# Altium PCB Third_PCB.PcbDoc
Units mm, origin at the board's own origin, x right, y up, seen from the top; angles counter-clockwise.
Board outline 50 x 45 mm, 2 copper layers (Top Layer, Bottom Layer); 79 components, 56 nets, 264 pads, 250 vias.
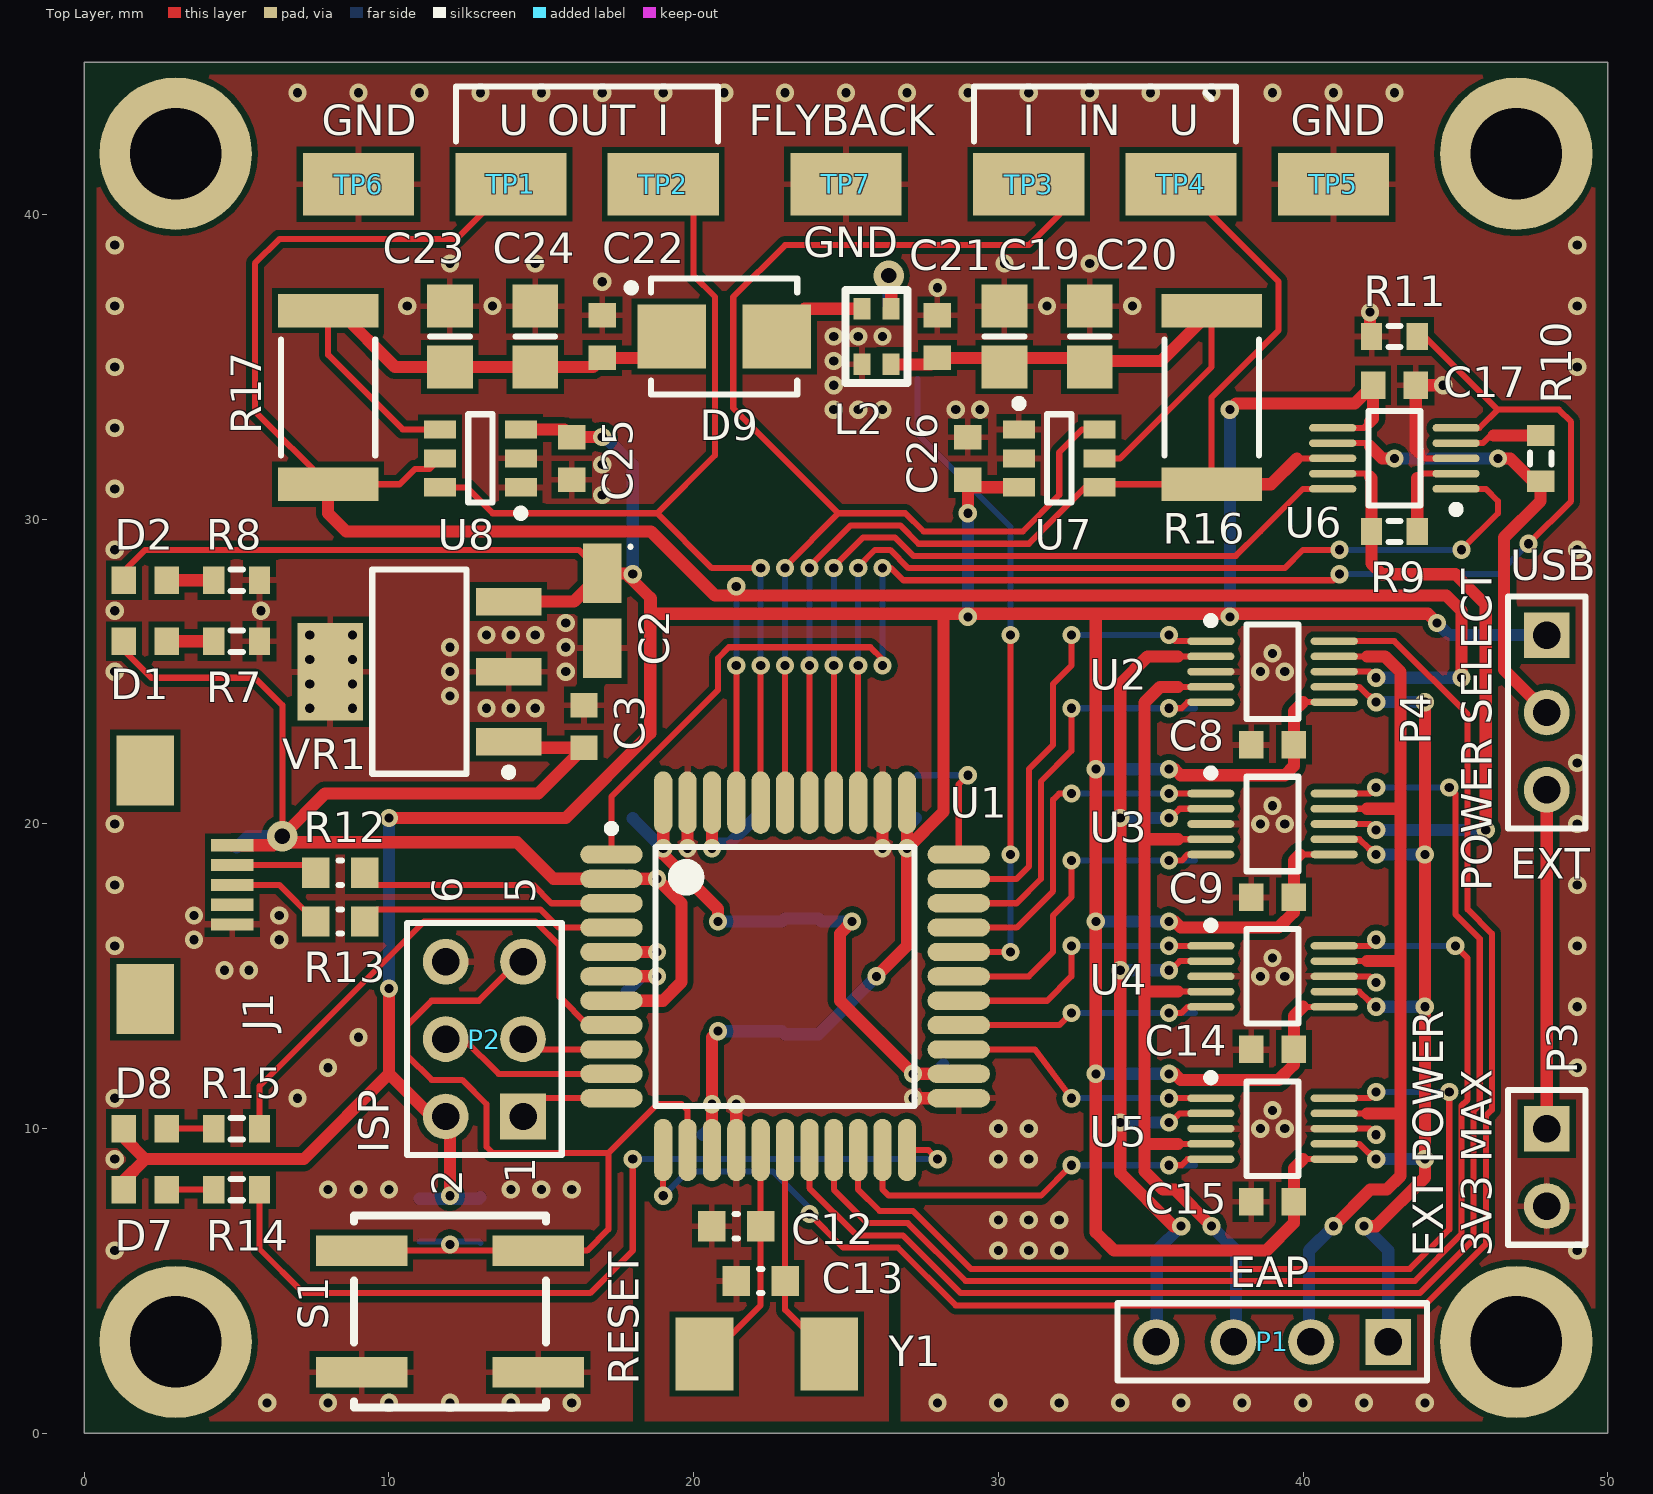
[diagram p0: Top Layer view]
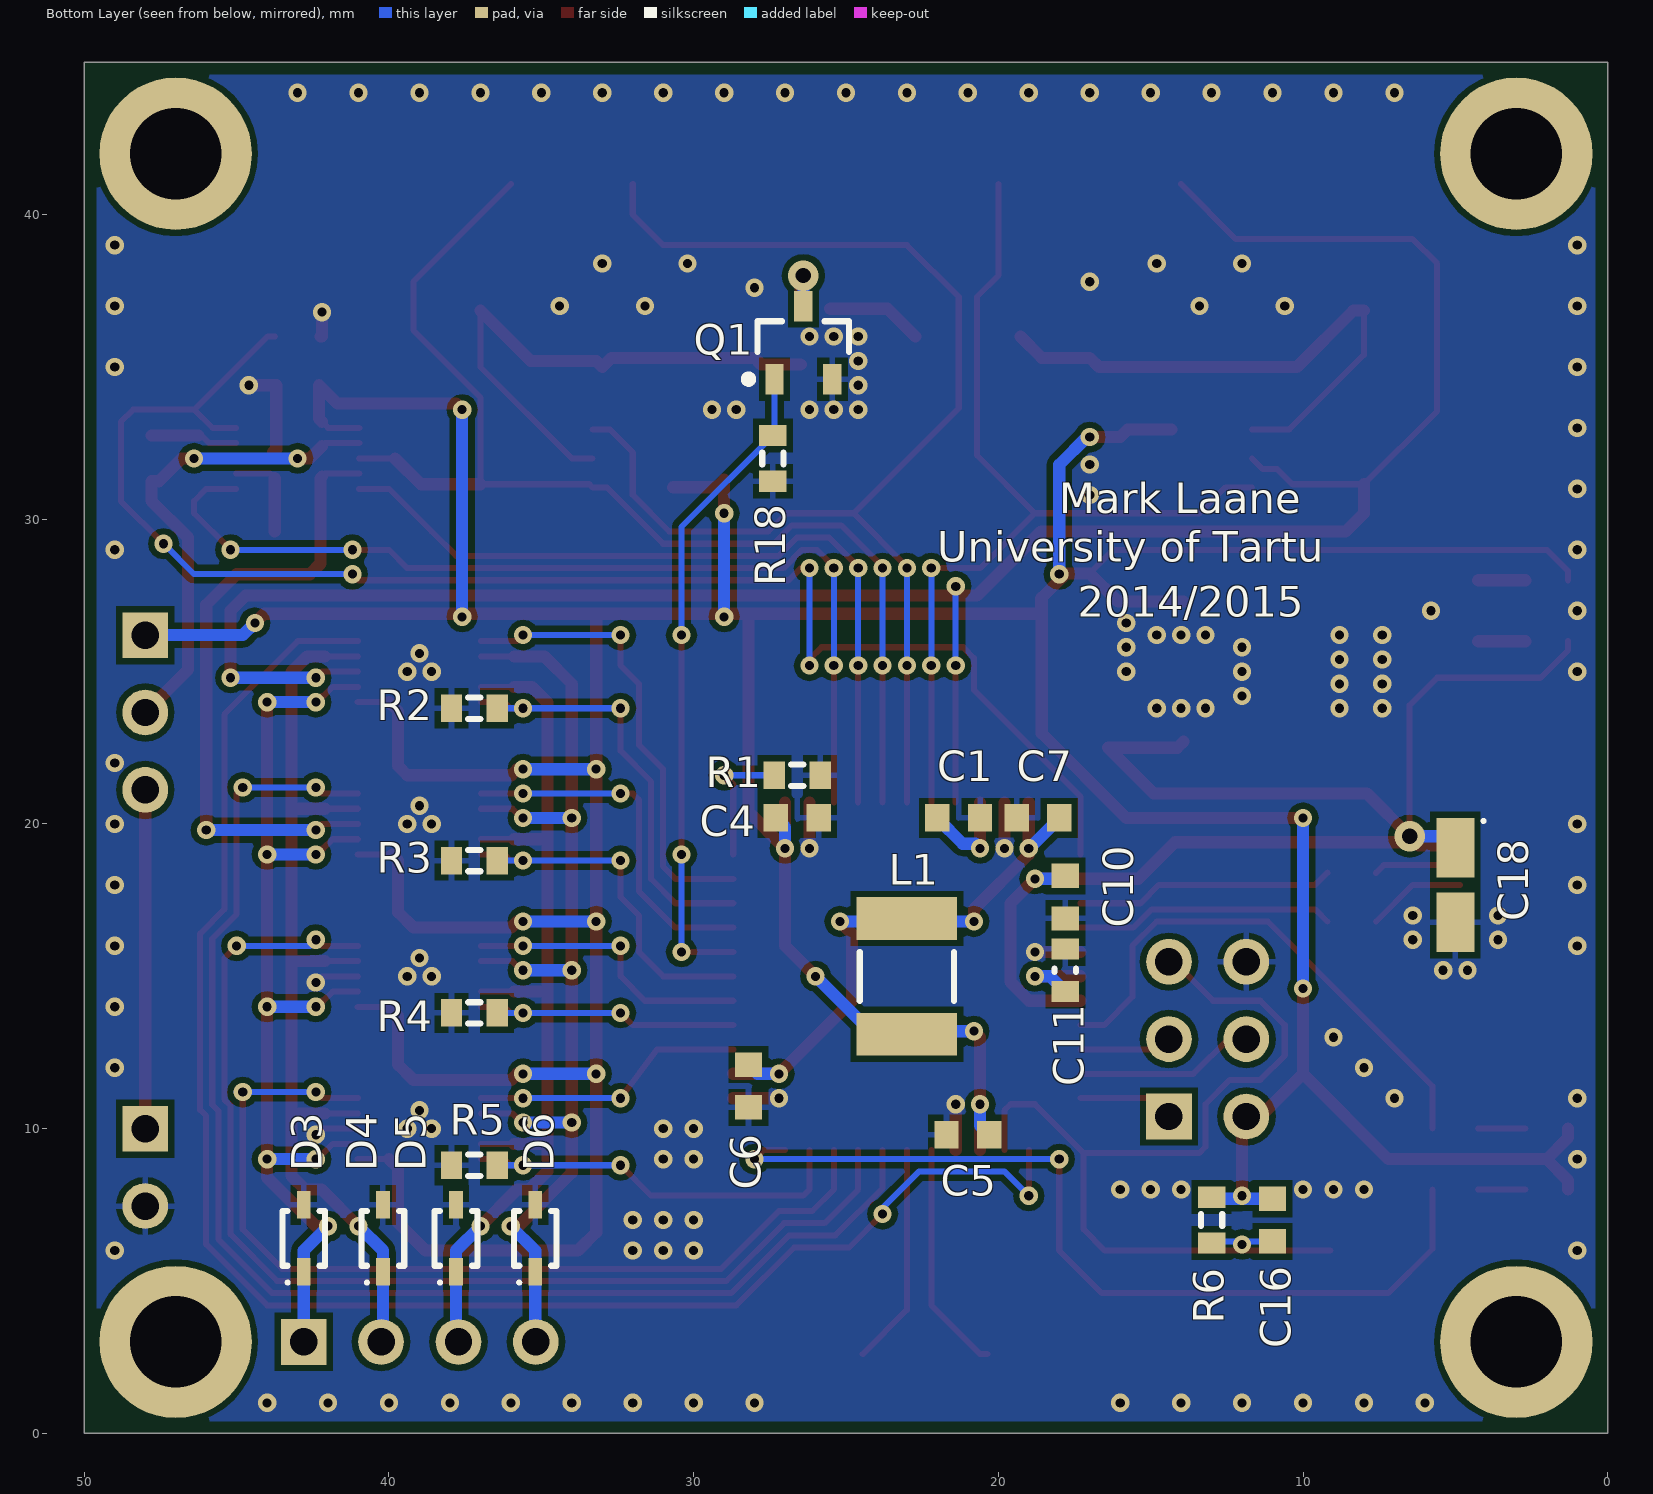
[diagram p1: Bottom Layer view, seen from below]

## Layer stack, top to bottom
Top Solder: solder mask 0.0102, Solder Resist, Dk 3.5
Top Layer: signal copper 0.0356
Dielectric 1: dielectric 0.32, FR-4, Dk 4.8
Bottom Layer: signal copper 0.0356
Bottom Solder: solder mask 0.0102, Solder Resist, Dk 3.5

## Board outline
0,0 50,0 50,45 0,45

## Design rules (kind name [scope] priority, off if disabled: settings)
Clearance [All] p1: gap=0.2
HoleSize [All] p1: absolutevalues=TRUE maxlimit=6.35 minlimit=0.3 maxpercent=80.000 minpercent=20.000
MinimumAnnularRing [All] p1: minimumring=0.15
MinimumSolderMaskSliver [All] p1: minsoldermaskwidth=0.1
PolygonConnect Vias [IsVia] p1: connectstyle=Direct reliefconductorwidth=1.254 reliefentries=4 polygonreliefangle="90 Angle" airgapwidth=0.254
PolygonConnect [All] p2: connectstyle=Relief reliefconductorwidth=0.2 reliefentries=4 polygonreliefangle="90 Angle" airgapwidth=0.2
RoutingVias [All] p1: holewidth=0.3 width=0.6 viastyle="Through Hole" minholewidth=0.3 minwidth=0.6 maxholewidth=6 maxwidth=10
SMDToPlane [All] p1: distance=1968504
SilkToSolderMaskClearance [IsPad] p1: minsilkscreentomaskgap=0.1 clearancetoexposedcopper=TRUE
SolderMaskExpansion "Covered Vias" [IsVia] p1: expansion=-999
SolderMaskExpansion [All] p2: expansion=0.102
UnpouredPolygon [All] p1: allowunpoured=FALSE
Width Power [InNet('3V3') OR InNet('GND') OR InNet('VBUS')] p1: maxlimit=0.4 minlimit=0.2 preferedwidth=0.4
Width [All] p2: maxlimit=0.4 minlimit=0.2 preferedwidth=0.2
26 further rules are at their usual default settings.

## Classes and differential pairs
component class Flyback: C19 C20 C21 C22 C23 C24 C25 C26 D9 L2 Q1 R16 R17 R18 U7 U8

## Components (designator, comment, footprint, x,y, rotation, side; value= is the part's Value field where it differs from the comment)
C1 "Cap Semi" 1608[0603] 21.3,20.2 r180 bottom
C2 "min 10uF" CAPMP3216X18N 17,27 r270 top
C3 "Cap Semi" 1608[0603] 16.4,23.2 r270 top
C4 "Cap Semi" 1608[0603] 26.6,20.2 r0 bottom
C5 "Cap Semi" 1608[0603] 21,9.8 r180 bottom
C6 "Cap Semi" 1608[0603] 28.2,11.4 r90 bottom
C7 "Cap Semi" 1608[0603] 18.7,20.2 r180 bottom
C8 "Cap Semi" 1608[0603] 39,22.6 r0 top
C9 "Cap Semi" 1608[0603] 39,17.6 r0 top
C10 "Cap Semi" 1608[0603] 17.8,17.6 r90 bottom
C11 "CAP 1uF 25V 0603(1608)" CAPC0603(1608)100_L 17.8,15.2 r270 bottom
C12 "CAP 27pF 50V 0603(1608)" CAPC0603(1608)100_N 21.4,6.8 r0 top
C13 "CAP 27pF 50V 0603(1608)" CAPC0603(1608)100_N 22.2,5 r0 top
C14 "Cap Semi" 1608[0603] 39,12.6 r0 top
C15 "Cap Semi" 1608[0603] 39,7.6 r0 top
C16 "Cap Semi" 1608[0603] 11,7 r90 bottom
C17 "Cap Semi" 1608[0603] 43,34.4 r180 top
C18 "10uF" CAPMP3216X18N 5,18 r270 bottom
C19 "Cap Semi" 6-0805_M 30.2,36 r270 top
C20 "Cap Semi" 6-0805_M 33,36 r270 top
C21 "Cap Semi" 1608[0603] 28,36 r270 top
C22 "Cap Semi" 1608[0603] 17,36 r270 top
C23 "Cap Semi" 6-0805_M 12,36 r270 top
C24 "Cap Semi" 6-0805_M 14.8,36 r270 top
C25 "Cap Semi" 1608[0603] 16,32 r90 top
C26 "Cap Semi" 1608[0603] 29,32 r270 top
D1 "Blue" 1608[0603] 2,26 r0 top
D2 "Green" 1608[0603] 2,28 r0 top
D3 "PMEG2005AEA" SOD323F 42.8,6.4 r90 bottom
D4 "PMEG2005AEA" SOD323F 40.2,6.4 r90 bottom
D5 "PMEG2005AEA" SOD323F 37.8,6.4 r90 bottom
D6 "PMEG2005AEA" SOD323F 35.2,6.4 r90 bottom
D7 "Green" 1608[0603] 2,8 r0 top
D8 "Yellow" 1608[0603] 2,10 r0 top
D9 "VS-10BQ030PbF" "VS-10BQ030PbF - DIOM4435X24N" 21,36 r0 top
J1 "USB micro B" "FCI MICRO USB B Receptable" 2,18 r270 top
L1 "Inductor" INDC4532 23,15 r90 bottom
L2 "COILCRAFT-PFD2015 (Rev)" PFD2015 26,36 r90 top
P1 "Header 4" HDR1X4 42.8,3 r180 top
P2 "ISCP" HDR2X3 14.4,10.4 r90 top
P3 "Header 2" HDR1X2 48,10 r270 top
P4 "Jumper" HDR1X3 48,26.2 r270 top
Q1 "IRFML8244TRPBF" SOT95P237X112-3N 26.4,35.8 r90 bottom
R1 "Res3" J1-0603 26.6,21.6 r0 bottom
R2 "Res3" J1-0603 37.2,23.8 r0 bottom
R3 "Res3" J1-0603 37.2,18.8 r0 bottom
R4 "Res3" J1-0603 37.2,13.8 r0 bottom
R5 "Res3" J1-0603 37.2,8.8 r0 bottom
R6 "Res3" J1-0603 13,7 r90 bottom
R7 "Res3" J1-0603 5,26 r180 top
R8 "Res3" J1-0603 5,28 r180 top
R9 "Res3" J1-0603 43,29.6 r0 top
R10 "Res3" J1-0603 47.8,32 r90 top
R11 "Res3" J1-0603 43,36 r180 top
R12 "22R 5% 0603(1608)" RESC0603(1608)_N 8.4,18.4 r0 top
R13 "22R 5% 0603(1608)" RESC0603(1608)_N 8.4,16.8 r0 top
R14 "Res3" J1-0603 5,8 r180 top
R15 "Res3" J1-0603 5,10 r180 top
R16 "Res3" RESC6332 37,34 r90 top
R17 "Res3" RESC6332 8,34 r270 top
R18 "Res3" J1-0603 27.4,32 r270 bottom
S1 "KSEM31J" KSEM31J 12,4 r180 top
TP1 "Testpoint" "Hawin testpoint" 14,41 r0 top
TP2 "Testpoint" "Hawin testpoint" 19,41 r0 top
TP3 "Testpoint" "Hawin testpoint" 31,41 r180 top
TP4 "Testpoint" "Hawin testpoint" 36,41 r180 top
TP5 "Testpoint" "Hawin testpoint" 41,41 r0 top
TP6 "Testpoint" "Hawin testpoint" 9,41 r180 top
TP7 "Testpoint" "Hawin testpoint" 25,41 r0 top
U1 "ATmega32U4-AU" 44ML_M 23,15 r0 top locked
U2 "ADG804YRMZ" ADI-RM-10_L 39,25 r0 top
U3 "ADG804YRMZ" ADI-RM-10_L 39,20 r0 top
U4 "ADG804YRMZ" ADI-RM-10_L 39,15 r0 top
U5 "ADG804YRMZ" ADI-RM-10_L 39,10 r0 top
U6 "ADG804YRMZ" ADI-RM-10_L 43,32 r180 top
U7 "ADM4073" "ADM4073 - SOT95P280X145-6N" 32,32 r0 top
U8 "ADM4073" "ADM4073 - SOT95P280X145-6N" 13,32 r180 top
VR1 "LM2937" "LM2937 - SOT230P700X180-4N" 11,25 r180 top
Y1 "8Mhz" ABM3 22.4,2.6 r0 top

## Footprints (in the part's own frame and the unit in brackets; to place one, negate y for a bottom-side part, rotate by r counter-clockwise, add the part's x,y. Pads: shape width x height; smd on the part's side, far side on the other; paste and mask are expansions set on the pad)
6-0805_M [mm] "Chip Resistor, Body 2.0x1.2mm, IPC Low Density"
  rect 1.4x1.5 smd: 1(-1,0) 2(1,0)
  silkscreen extent 0,-0.65 0,0.65, body extent -1.07,-0.7 1.07,0.7, height 0.7
44ML_M [mm] "Thin QFP, 44-Leads, Body 10x10mm, Pitch 0.8mm, IPC Low Density"
  oval 2.05x0.6 smd: 1(-5.7,4) 2(-5.7,3.2) 3(-5.7,2.4) 4(-5.7,1.6) 5(-5.7,0.8) 6(-5.7,0) 7(-5.7,-0.8) 8(-5.7,-1.6) 9(-5.7,-2.4) 10(-5.7,-3.2) 11(-5.7,-4) 23(5.7,-4) 24(5.7,-3.2) 25(5.7,-2.4) 26(5.7,-1.6) 27(5.7,-0.8) 28(5.7,0) 29(5.7,0.8) 30(5.7,1.6) 31(5.7,2.4) 32(5.7,3.2) 33(5.7,4)
  oval 0.6x2.05 smd: 12(-4,-5.7) 13(-3.2,-5.7) 14(-2.4,-5.7) 15(-1.6,-5.7) 16(-0.8,-5.7) 17(0,-5.7) 18(0.8,-5.7) 19(1.6,-5.7) 20(2.4,-5.7) 21(3.2,-5.7) 22(4,-5.7) 34(4,5.7) 35(3.2,5.7) 36(2.4,5.7) 37(1.6,5.7) 38(0.8,5.7) 39(0,5.7) 40(-0.8,5.7) 41(-1.6,5.7) 42(-2.4,5.7) 43(-3.2,5.7) 44(-4,5.7)
  silkscreen extent -5.82,-4.25 4.25,4.97, body extent -5,-5 5,5, height 1.2
1608[0603] [mm] "Chip Capacitor, Body 1.6x0.8mm, IPC High Density"
  rect 0.8x0.9 smd: 1(-0.7,0) 2(0.7,0)
  body extent -0.87,-0.48 0.87,0.48, height 1.3
ABM3 [mm]
  rect 1.9x2.4 smd: 1(-2.05,0) 2(2.05,0)
  body extent -2.5,-1.6 2.5,1.6, height 1.3
ADI-RM-10_L [mm] "SOP, 10-Leads, Body 3x3mm, Pitch 0.5mm, IPC High Density"
  oval 1.55x0.25 smd: 1(-2.025,1) 2(-2.025,0.5) 3(-2.025,0) 4(-2.025,-0.5) 5(-2.025,-1) 6(2.025,-1) 7(2.025,-0.5) 8(2.025,0) 9(2.025,0.5) 10(2.025,1)
  silkscreen extent -2.15,-1.55 0.85,1.8, body extent -1.55,-1.55 1.55,1.55, height 1.1
"ADM4073 - SOT95P280X145-6N" [mm] "SOT23, 6-Leads, Body 2.90x2.80mm, Pitch 0.95mm, IPC Medium Density"
  rect 1.05x0.6 smd: 1(-1.325,0.95) 2(-1.325,0) 3(-1.325,-0.95) 4(1.325,-0.95) 5(1.325,0) 6(1.325,0.95)
  silkscreen extent -1.45,-1.45 0.4,1.92, body extent -0.8,-1.45 0.8,1.45, height 1.45
CAPC0603(1608)100_L [mm] "Chip Capacitor, Body 1.6x0.8mm, Height 1.0mm, IPC High Density"
  rect 0.7x0.9 smd: 1(-0.7,0) 2(0.7,0)
  silkscreen extent -0.05,-0.35 0.05,0.35, body extent -0.87,-0.47 0.88,0.48, height 1
CAPC0603(1608)100_N [mm] "Chip Capacitor, Body 1.6x0.8mm, Height 1.0mm, IPC Medium Density"
  rect 0.9x1 smd: 1(-0.8,0) 2(0.8,0)
  silkscreen extent -0.05,-0.4 0.05,0.4, body extent -0.87,-0.48 0.88,0.47, height 1
CAPMP3216X18N [mm] "Molded Capacitor, 2-Leads, Body 3.20x1.60mm, IPC Medium Density"
  rect 1.95x1.25 smd: 1(1.225,0) 2(-1.225,0)
  silkscreen extent -2.15,0.88 -2.05,0.97, body extent -1.7,-0.9 1.7,0.9, height 1.8
"FCI MICRO USB B Receptable" [mm]
  rect 2.3x1.9 smd: Case(-3.75,0) Case(3.75,0)
  rect 0.4x1.4 smd: D+(0,2.85) D-(-0.65,2.85) GND(1.3,2.85) ID(0.65,2.85) Vbus(-1.3,2.85)
  body extent -4,-2.75 4,2.85, height 2.95
"Hawin testpoint" [mm]
  rect 3.65x2.05 smd: 0(0,0)
HDR1X2 [mm] "Connector; Header; 2 Position"
  rect 1.5x1.5 hole 0.9: 1(0,0)
  round 1.5 hole 0.9: 2(2.54,0)
  silkscreen extent -1.27,-1.27 3.81,1.27
HDR1X3 [mm] "Connector; Header; 3 Position"
  rect 1.5x1.5 hole 0.9: 1(0,0)
  round 1.5 hole 0.9: 2(2.54,0) 3(5.08,0)
  silkscreen extent -1.27,-1.27 6.35,1.27
HDR1X4 [mm] "Connector; Header; 4 Position"
  rect 1.5x1.5 hole 0.9: 1(0,0)
  round 1.5 hole 0.9: 2(2.54,0) 3(5.08,0) 4(7.62,0)
  silkscreen extent -1.27,-1.27 8.89,1.27
HDR2X3 [mm] "Connector; Header; 3x2 Position"
  rect 1.5x1.5 hole 0.9: 1(0,0)
  round 1.5 hole 0.9: 2(0,2.54) 3(2.54,0) 4(2.54,2.54) 5(5.08,0) 6(5.08,2.54)
  silkscreen extent -1.27,-1.27 6.35,3.81
INDC4532 [mm] "Chip Inductor, Body 4.5x3.2mm, IPC High Density"
  rect 1.4x3.3 smd: 1(-1.9,0) 2(1.9,0)
  silkscreen extent -0.8,-1.55 0.8,1.55, body extent -2.4,-1.7 2.4,1.7, height 0.55
J1-0603 [mm] "Chip Resistor, Body 1.6x0.8mm, IPC High Density"
  rect 0.7x0.9 smd: 1(-0.75,0) 2(0.75,0)
  silkscreen extent -0.2,-0.35 0.2,0.35, body extent -0.85,-0.48 0.85,0.48, height 0.9
KSEM31J [mm] "Tactile switch"
  rect 3x1 smd: 0(-2.9,-2) 0(2.9,-2) 1(-2.9,2) 1(2.9,2)
  silkscreen extent -3.15,-3.15 3.15,3.15
"LM2937 - SOT230P700X180-4N" [mm] "SOT223, 4-Leads, Body 6.50x7.00mm (avg), Pitch 2.30mm, IPC Medium Density"
  rect 2.15x0.9 smd: 1(-2.925,2.3) 2(-2.925,0) 3(-2.925,-2.3)
  rect 2.15x3.2 smd: 4(2.925,0)
  silkscreen extent -3.05,-3.35 1.55,3.42, body extent -1.85,-3.35 1.85,3.35, height 1.8
PFD2015 [mil] "Coupled inductor"
  rect 28x22 smd: 1(-36,-19) 2(36,-19) 3(36,19) 4(-36,19)
  silkscreen extent -60,-40 60,40
RESC0603(1608)_N [mm] "Chip Resistor, Body 1.6x0.8mm, IPC Medium Density"
  rect 0.9x1 smd: 1(-0.8,0) 2(0.8,0)
  silkscreen extent -0.05,-0.4 0.05,0.4, body extent -0.85,-0.47 0.85,0.47, height 0.6
RESC6332 [mm] "Chip Resistor, Body 6.3x3.2mm, IPC High Density"
  rect 1.1x3.3 smd: 1(-2.85,0) 2(2.85,0)
  silkscreen extent -1.9,-1.55 1.9,1.55, body extent -3.22,-1.68 3.22,1.68, height 0.9
SOD323F [mm] "SODFL, 2-Leads, Body 1.25x2.50mm, IPC Medium Density"
  rect 0.9x0.45 smd: 1(-1.1,0) 2(1.1,0)
  silkscreen extent -1.5,-0.7 0.9,0.7, body extent -0.9,-0.67 0.9,0.67, height 0.8
SOT95P237X112-3N [mm] "SOT23, 3-Leads, Body 2.92x2.37mm, Pitch 0.95mm, IPC Medium Density"
  rect 1x0.6 smd: 1(-1.2,0.95) 2(-1.2,-0.95) 3(1.2,0)
  silkscreen extent -1.32,-1.5 0.7,1.93, body extent -0.7,-1.52 0.7,1.52, height 1.12
"VS-10BQ030PbF - DIOM4435X24N" [mm] "Molded Diode, 2-Leads, Body 4.40x3.55mm, IPC Medium Density"
  rect 2.25x2.1 smd: 1(-1.725,0) 2(1.725,0)
  silkscreen extent -3.17,-1.9 2.4,1.9, body extent -2.35,-1.9 2.35,1.9, height 2.4

## Part data
C1 C3 C4 C5 C6 C7 C8 C9 C10 C14 C15 C16 C17 C19 C20 C21 C22 C23 C24 C25 C26: "Capacitor (Semiconductor SIM Model)"
C2 C18: library part Tantalum
C11: library part CMP-1035-00880-1
C12 C13: library part CMP-1035-00010-1
D1 D2 D7 D8: library part LED2, "Typical RED, GREEN, YELLOW, AMBER GaAs LED"
P1: "Header, 4-Pin"
P2: library part "Header 3X2", "Header, 3-Pin, Dual row"
P3: "Header, 2-Pin"
P4: library part "Header 3", "Header, 3-Pin"
Q1: "INTERNATIONAL RECTIFIER - IRFML8244TRPBF - N CH MOSFET, 25V, 5.8A, 3-SOT-23, FULL REEL"
R1 R2 R3 R4 R5 R6 R7 R8 R9 R10 R11 R14 R15 R16 R17 R18: "Resistor"
R12 R13: library part CMP-1012-00034-1, "22R 0.1W 5% 0603 (1608 Metric)  SMD"
U1: library part CMP-0095-00285-2, "8-bit AVR Microcontroller, 2.7-5.5V, 16MHz, 32KB Flash, 1KB EEPROM, 2.5KB SRAM, USB Controller, 44-pin TQFP, Industrial Grade (-40°C to 85°C), Ext Osc"
U2 U3 U4 U5 U6: library part CMP-0798-00106-1, "1.65 to 3.6 V, CMOS, 0.5 Ohm, 4-Channel Multiplexer, -40 to 125 degC, 10-pin SOP (RM-10), Tube"
Y1: library part "Abracon ABM3 Crystal"

## Free pads (board coordinates)
  round 5 hole 3 mask+0: MOUNT(3,3) MOUNT(3,42) MOUNT(47,3) MOUNT(47,42)

## Via types
v1: diameter 0.6, hole 0.3, Top Layer to Bottom Layer, 248 vias
v2: diameter 1, hole 0.5, Top Layer to Bottom Layer, 2 vias

## Nets (pads, with @x,y where several pads share a name; then routed paths per layer and width w, separated by ;. In a path a pad name is that pad's centre, name@x,y a point inside that pad or via, vN(x,y) a via of type N, cw(c..) or ccw(c..) an arc to the next point about the centre after c; other vN are vias at no path point)
3V3: C2.2 C4.2 C5.2 C8.2 C9.2 C14.2 C15.2 C16.2 C17.2 C25.2 C26.2 D2.1 D7.1 D8.1 L1.1 P2.2 P4.1 R6.2 U1.14 U1.34 U2.6 U3.6 U4.6 U5.6 U6.6 U7.3 U8.3 VR1.3 | length 209
  Top Layer w0.2: D2.1 1.3,28.3 2,29 16.225,29 C2.2 ; 39.894,19 U3.6 ; 40,9 U5.6 ; 40,14 40.2,14 U4.6 ; 40,24 U2.6 ; U6.6 42,33 42.2,33.2
  Top Layer w0.4: D7.1 1.3,8.3 2,9 ; D8.1 1.3,9.7 2,9 ; v1(10,14.6) 10,11.8 ; v1(10,20.2) 15.8,20.2 18.575,22.975 18.575,27.425 ; v1(12,7.8) 12,10.26 P2.2 11.4,10.4 10,11.8 ; VR1.3 16.075,27.3 C2.2 v1@17.775,28.225 ; U8.3 15.75,32.95 C25.2 v1(17,32.7) ; v1@17.9,28.1 18.575,27.425 ; U1.14 v1(20.6,10.8) 20.6,13 v1(20.8,13.2) ; v1(26,15) 27,16 v1(27,19.2) ; U1.34 v1(27,19.2) ; v1(29,26.8) v1@29,26.9 ; v1(29,30.2) C26.2 29.25,31.05 U7.3 ; v1(35.6,11.8) 35.79,11.8 35.99,11.6 39.2,11.6 39.7,12.1 C14.2 39.7,13.7 40,14 ; v1(35.6,16.8) 35.79,16.8 35.99,16.6 39.2,16.6 39.7,17.1 C9.2 39.7,18.806 39.894,19 ; v1(35.6,21.8) 35.79,21.8 35.99,21.6 39.4,21.6 39.7,21.9 C8.2 39.7,23.7 40,24 ; v1(37.6,33.6) 37.8,33.8 41.7,33.8 C17.2 42.3,33.3 42.2,33.2 ; 40,9 39.7,8.7 C15.2 39.7,6.9 38.8,6 33.8,6 33.2,6.6 v1(33.2,11.8) v1(33.2,16.8) v1(33.2,21.8) 33.2,26.9 ; v1(44.4,26.6) 44.1,26.9 33.2,26.9 ; 2,9 7.2,9 10,11.8 ; 18.575,27.425 18.6,27.4 18.6,26.8 18.7,26.9 28.2,26.9 ; v1(27,19.2) 28.2,20.4 28.2,26.9 ; 28.2,26.9 v1@29,26.9 ; v1@29,26.9 33.2,26.9
  Bottom Layer w0.4: v1(10,14.6) v1(10,20.2) ; C16.2 12.95,7.7 R6.2 ; v1(17,32.7) 17.09,32.7 18,31.79 v1(18,28.2) ; C5.2 20.6,10.1 v1(20.6,10.8) ; v1(20.8,13.2) 22.9,13.2 L1.1 24.1,13.1 v1(26,15) ; v1(27,19.2) 27,19.9 C4.2 ; v1(29,26.8) v1(29,30.2) ; v1(33.2,11.8) v1(35.6,11.8) ; v1(33.2,16.8) v1(35.6,16.8) ; v1(33.2,21.8) v1(35.6,21.8) ; v1(37.6,26.8) v1(37.6,33.6) ; v1(44.4,26.6) 44.8,26.2 P4.1
A0_0: U1.30 U3.1 | length 11.9
  Top Layer w0.2: U1.30 30.6,16.6 31.8,17.8 31.8,20.8 32,21 v1(32.4,21) ; v1(35.6,21) U3.1
  Bottom Layer w0.2: v1(32.4,21) v1(35.6,21)
A0_1: U1.32 U2.1 | length 15.3
  Top Layer w0.2: U1.32 30,18.2 30.6,18.2 31,18.6 31,21.8 31.8,22.6 31.8,24.6 32.4,25.2 v1(32.4,26.2) ; v1(35.6,26.2) 35.8,26 U2.1
  Bottom Layer w0.2: v1(32.4,26.2) v1(35.6,26.2)
A0_2: U1.27 U4.1 | length 9.6
  Top Layer w0.2: U1.27 31.6,14.2 32.4,15 v1(32.4,16) ; v1(35.6,16) U4.1
  Bottom Layer w0.2: v1(32.4,16) v1(35.6,16)
A0_3: U1.25 U5.1 | length 9.1
  Top Layer w0.2: U1.25 31.2,12.6 v1(32.4,11) ; v1(35.6,11) U5.1
  Bottom Layer w0.2: v1(32.4,11) v1(35.6,11)
A0_4: U1.36 U6.1 | length 31.9
  Top Layer w0.2: U1.36 v1(25.4,25.2) ; v1(25.4,28.4) 25.4,28.449 25.951,29 26.449,29 27.049,28.4 39.4,28.4 40,29 v1(41.2,29) ; U6.1 46,31 46.4,30.6 46.4,30.2 v1(45.2,29)
  Bottom Layer w0.2: v1(25.4,25.2) v1(25.4,28.4) ; v1(41.2,29) v1(45.2,29)
A1_0: U1.18 U3.10 | length 44.4
  Top Layer w0.2: U1.18 23.8,8.049 25.349,6.5 26.866,6.5 28.766,4.6 43.834,4.6 45.6,6.366 45.6,10.586 45.8,10.786 45.8,16.234 45,17.034 45,21 v1(44.8,21.2) ; U3.10 42.2,21 v1(42.4,21.2)
  Bottom Layer w0.2: v1(42.4,21.2) v1(44.8,21.2)
A1_1: U1.12 U2.10 | length 54.8
  Top Layer w0.2: v1(19,7.8) U1.12 ; v1(23.8,7.2) 24.9,6.1 26.7,6.1 28.6,4.2 44,4.2 46,6.2 46,10.42 46.2,10.62 46.2,16.4 45.4,17.2 45.4,23.6 43,26 U2.10
  Bottom Layer w0.2: v1(19,7.8) 19.8,8.6 22.6,8.6 23.8,7.4 v1(23.8,7.2)
A1_2: U1.19 U4.10 | length 37.6
  Top Layer w0.2: U1.19 24.6,8 25.7,6.9 27.031,6.9 28.931,5 43.669,5 45.2,6.531 45.2,10.751 45.4,10.951 45.4,15.6 v1(45,16) ; U4.10 42.2,16 v1(42.4,16.2)
  Bottom Layer w0.2: v1(42.4,16.2) 42.6,16 v1(45,16)
A1_3: U1.20 U5.10 | length 31.1
  Top Layer w0.2: U1.20 25.4,8 26.1,7.3 27.197,7.3 29.097,5.4 43.503,5.4 44.8,6.697 v1(44.8,11.2) ; U5.10 42.2,11 v1(42.4,11.2)
  Bottom Layer w0.2: v1(42.4,11.2) 45,11.2 v1(44.8,11.2)
A1_4: U1.37 U6.10 | length 25.7
  Top Layer w0.2: U1.37 v1(24.6,25.2) ; v1(24.6,28.4) 24.6,28.449 25.551,29.4 26.614,29.4 27.214,28.8 37.8,28.8 38.6,29.6 40,31 U6.10
  Bottom Layer w0.2: v1(24.6,25.2) v1(24.6,28.4)
EAP_IN: R17.2 TP1.0 U1.41 U2.8 U8.5 | length 74.8
  Top Layer w0.2: U8.5 11.325,31.65 10.85,31.65 10.35,31.15 R17.2 5.6,33.55 5.6,38.4 6.4,39.2 12.2,39.2 TP1.0 ; U1.41 v1(21.4,25.2) ; U2.8 42.2,25 v1(42.4,24.8)
  Top Layer w0.4: R17.2 8,30.2 8.6,29.6 18.6,29.6 20.7,27.5 44.7,27.5 45.2,27 v1(45.2,24.8)
  Bottom Layer w0.2: v1(21.4,25.2) 21.4,27 v1(21.4,27.8)
  Bottom Layer w0.4: v1(42.4,24.8) v1(45.2,24.8)
EAP_IN_CURRENT: TP2.0 U1.40 U8.6 | length 31.2
  Top Layer w0.2: U8.6 12.55,31.05 13.4,30.2 18.8,30.2 ; TP2.0@20,41 20,38 20.7,37.3 20.7,32.1 18.8,30.2 ; U1.40 v1(22.2,25.2) ; v1(22.2,28.4) 20.6,28.4 18.8,30.2
  Bottom Layer w0.2: v1(22.2,25.2) v1(22.2,28.4)
EAP_OUT: R9.1 U3.8 U6.9 | length 20.9
  Top Layer w0.2: U6.9 42.1,31.5 42.2,31.4 ; U3.8 42.2,20 v1(42.4,19.8)
  Top Layer w0.4: 42.2,31.4 42.25,31.35 R9.1 42.25,28.55 42.6,28.2 45,28.2 46,27.2 v1(46,19.8)
  Bottom Layer w0.4: v1(42.4,19.8) v1(46,19.8)
EN_0: R3.1 U1.28 U3.5 | length 12.2
  Top Layer w0.2: U1.28 31,15 31.8,15.8 31.8,17 32.4,17.6 v1(32.4,18.8) ; v1(35.6,18.8) 35.8,18.8 36.014,18.8 36.214,19 U3.5
  Bottom Layer w0.2: v1(32.4,18.8) v1(35.6,18.8) R3.1
EN_1: R2.1 U1.31 U2.5 | length 14.6
  Top Layer w0.2: U1.31 30.6,17.4 31.4,18.2 31.4,21.4 32.4,22.4 v1(32.4,23.8) ; v1(35.6,23.8) 35.8,23.8 36.014,23.8 36.214,24 U2.5
  Bottom Layer w0.2: v1(32.4,23.8) v1(35.6,23.8) R2.1
EN_2: R4.1 U1.26 U4.5 | length 9.4
  Top Layer w0.2: U1.26 32,13.4 v1(32.4,13.8) ; v1(35.6,13.8) 35.8,13.8 36.014,13.8 36.214,14 U4.5
  Bottom Layer w0.2: v1(32.4,13.8) v1(35.6,13.8) R4.1
EN_3: R5.1 U1.21 U5.5 | length 13.5
  Top Layer w0.2: U1.21 26.2,8 26.4,7.8 31.4,7.8 v1(32.4,8.8) ; v1(35.6,8.8) 36.014,8.8 36.214,9 U5.5
  Bottom Layer w0.2: v1(32.4,8.8) v1(35.6,8.8) R5.1
EN_4: R11.1 U1.1 U6.5 | length 51.3
  Top Layer w0.2: U1.1 17.3,20.9 20.8,24.4 20.8,25.449 21.151,25.8 25.8,25.8 26.2,25.4 v1(26.2,25.2) ; v1(26.2,28.4) 26.483,28.4 26.883,28 41,28 v1(41.2,28.2) ; R11.1 43.993,36 46.393,33.6 ; U6.5 45.793,33 46.393,33.6 ; v1(47.4,29.2) 48.8,30.6 48.8,33.2 48.4,33.6 46.393,33.6
  Bottom Layer w0.2: v1(26.2,25.2) v1(26.2,28.4) ; v1(41.2,28.2) 46.4,28.2 v1(47.4,29.2)
EXT_VCC: P3.1 P4.3 | length 11.1
  Top Layer w0.4: P3.1 P4.3
FLYBACK_CONTROL: Q1.1 R18.1 U1.29 | length 22.1
  Top Layer w0.2: U1.29 30.6,15.8 v1(30.4,15.8) ; v1(30.4,19) v1(30.4,26.2)
  Bottom Layer w0.2: R18.1@27.35,32.8 Q1.1 ; R18.1 30.4,29.75 v1(30.4,26.2) ; v1(30.4,15.8) v1(30.4,19)
FLYBACK_IN: R16.1 TP4.0 U1.38 U6.8 U7.4 | length 39
  Top Layer w0.2: U1.38 v1(23.8,25.2) ; v1(23.8,28.4) 23.8,28.449 25.151,29.8 26.78,29.8 27.38,29.2 31,29.2 32.85,31.05 U7.4 33.425,31.15 R16.1 37,34 39.2,36.2 39.2,37.8 TP4.0 ; 39.8,32 U6.8
  Top Layer w0.4: R16.1 38.95,31.15 39.8,32
  Bottom Layer w0.2: v1(23.8,25.2) v1(23.8,28.4)
FLYBACK_IN_CURRENT: TP3.0 U1.39 U7.6 | length 42.6
  Top Layer w0.2: U1.39 v1(23,25.2) ; v1(23,28.4) 23,28.449 24.751,30.2 ; TP3.0@32,41 32,40 31,39 23,39 21.3,37.3 21.3,33.651 24.751,30.2 ; U7.6 32.75,32.95 32,32.2 32,30.8 30.8,29.6 27.546,29.6 26.946,30.2 24.751,30.2
  Bottom Layer w0.2: v1(23,25.2) v1(23,28.4)
GND: C1.2 C2.1 C3.1 C4.1 C5.1 C6.1 C7.1 C8.1 C9.1 C10.1 C11.1 C12.1 C13.1 C14.1 C15.1 C17.1 C18.1 C19.1 C20.1 C21.1 C22.1 C23.1 C24.1 C25.1 C26.1 D3.2 D4.2 D5.2 D6.2 J1.GND L2.4 P2.6 P3.2 Q1.2 R1.1 R2.2 R3.2 R4.2 R5.2 R7.1 R8.1 R11.2 R18.2 S1.1 TP5.0 TP6.0 TP7.0 U1.5 U1.15 U1.23 U1.35 U1.43 U2.3 U3.3 U4.3 U4.8 U5.3 U5.8 U6.3 U7.1 U7.2 U8.1 U8.2 VR1.2 VR1.4 | length 15.7
  Top Layer w0.2: U5.8 42.2,10 v1(42.4,9.8) ; U4.8 42.2,15 v1(42.4,14.8) ; 43.8,32.2 44,32 U6.3
  Top Layer w0.4: U1.5 v1(18.8,15.8) ; v1(19.8,19.2) U1.43 ; U1.15 v1(21.4,10.8) ; v1(26.2,19.2) U1.35 ; v1(27.2,11) U1.23 ; v1(42.2,36.8) 42.2,36 R11.2 ; 43.8,32.2 43.7,32.3 C17.1 v1(44.6,34.4)
  other v1: 6,1 8,1 10,1 12,1 14,1 16,1 28,1 30,1 32,1 34,1 36,1 38,1 40,1 42,1 44,1 1,6 30,6 31,6 32,6 49,6 30,7 31,7 32,7 8,8 9,8 10,8 14,8 15,8 16,8 1,9 30,9 31,9 30,10 31,10 38.6,10 39.4,10 39,10.6 1,11 7,11 8,12 49,12 9,13 49,14 38.6,15 39.4,15 4.6,15.2 5.4,15.2 39,15.6 1,16 49,16 3.6,16.2 6.4,16.2 3.6,17 6.4,17 1,18 49,18 1,20 38.6,20 39.4,20 49,20 39,20.6 49,22 7.4,23.8 8.8,23.8 13.2,23.8 14,23.8 14.8,23.8 12,24.2 7.4,24.6 8.8,24.6 1,25 12,25 15.8,25 38.6,25 39.4,25 7.4,25.4 8.8,25.4 39,25.6 12,25.8 15.8,25.8 7.4,26.2 8.8,26.2 13.2,26.2 14,26.2 14.8,26.2 15.8,26.6 1,27 5.8,27 1,29 49,29 17,30.8 1,31 17,31.8 1,33 24.6,33.6 25.4,33.6 26.2,33.6 28.6,33.6 29.4,33.6 24.6,34.4 1,35 49,35 24.6,35.2 24.6,36 25.4,36 26.2,36 1,37 10.6,37 13.4,37 31.6,37 34.4,37 49,37 28,37.6 17,37.8 12,38.4 14.8,38.4 30.2,38.4 33,38.4 1,39 49,39 7,44 9,44 11,44 13,44 15,44 17,44 19,44 21,44 23,44 25,44 27,44 29,44 31,44 33,44 35,44 37,44 39,44 41,44 43,44
MISO: P2.1 U1.11 | length 3.1
  Top Layer w0.2: P2.1 15,11 U1.11
MOSI: P2.4 U1.10 | length 5.9
  Top Layer w0.2: P2.4 12.46,12.94 13.6,11.8 U1.10
NetC1_1: C1.1 U1.42 | length 3.3
  Top Layer w0.4: v1(20.6,19.2) U1.42
  Bottom Layer w0.4: v1(20.6,19.2) 20.75,19.35 21.166,19.35 22,20.184 C1.1
NetC6_2: C6.2 C7.2 L1.2 U1.24 U1.44 | length 19.3
  Top Layer w0.4: U1.44 v1(19,19.2) 19,19.01 20.8,17.21 v1(20.8,16.8) ; v1(25.2,16.8) 24.8,16.4 24.8,14.2 v1(27.2,11.8) U1.24
  Bottom Layer w0.4: C7.2 18,20.184 18.984,19.2 v1(19,19.2) ; v1(20.8,16.8) 22.9,16.8 L1.2 24.1,16.9 24.2,16.8 v1(25.2,16.8) ; v1(27.2,11.8) 27.9,11.8 C6.2
NetC11_2: C11.2 U1.6 | length 2.7
  Top Layer w0.4: U1.6 v1(18.8,15)
  Bottom Layer w0.4: C11.2 18.3,15 v1(18.8,15)
NetC12_2: C12.2 U1.16 Y1.1 | length 7.6
  Top Layer w0.2: Y1.1 20.6,2.6 22.2,4.2 C12.2 U1.16
NetC13_2: C13.2 U1.17 Y1.2 | length 7.3
  Top Layer w0.2: U1.17 23,4.05 Y1.2
NetC19_2: C19.2 C20.2 C21.2 L2.1 R16.2 U7.5 | length 18.3
  Top Layer w0.2: U7.5 34,32 37,35 R16.2
  Top Layer w0.4: L2.1 27.786,35.086 C21.2 32.7,35.3 C20.2 33.2,35.2 35.35,35.2 R16.2
NetC22_2: C22.2 C23.2 C24.2 D9.1 R17.1 U8.4 | length 18.6
  Top Layer w0.2: R17.1 8,35.4 10.45,32.95 U8.4
  Top Layer w0.4: R17.1 8.35,36.85 10.2,35 C23.2 16.7,35 C22.2 18.575,35.3 D9.1
NetD1_2: D1.2 R7.2 | length 1.5
  Top Layer w0.4: D1.2 R7.2
NetD2_2: D2.2 R8.2 | length 1.5
  Top Layer w0.4: D2.2 R8.2
NetD3_1: D3.1 P1.1 U2.7 U3.7 U4.7 U5.7 | length 35.1
  Top Layer w0.2: U5.7 41.851,9.5 42.151,9.2 42.2,9.2 v1(42.4,9) ; U4.7 41.851,14.5 42.151,14.2 42.2,14.2 v1(42.4,14) ; U3.7 41.851,19.5 42.151,19.2 42.2,19.2 v1(42.4,19) ; U2.7 41.851,24.5 42.151,24.2 42.2,24.2 v1(42.4,24)
  Top Layer w0.4: v1(42,6.8) 42.4,6.8 44,8.4 v1(44,9) v1(44,14) v1(44,19) v1(44,24)
  Bottom Layer w0.4: v1(42,6.8) 42.8,6 P1.1 ; v1(42.4,9) v1(44,9) ; v1(42.4,14) v1(44,14) ; v1(42.4,19) v1(44,19) ; v1(42.4,24) v1(44,24)
NetD4_1: D4.1 P1.2 U2.9 U3.9 U4.9 U5.9 | length 32.3
  Top Layer w0.2: U5.9 42.1,10.5 ; U4.9 42.1,15.5 ; U3.9 42.1,20.5 ; U2.9 42.1,25.5
  Top Layer w0.4: v1(41,6.8) 41.01,6.8 42.21,8 42.751,8 43.2,8.449 43.2,15.4 ; 42.1,10.5 43.1,10.5 ; 42.1,15.5 43.1,15.5 43.2,15.4 ; 42.1,20.5 43.1,20.5 ; 42.1,25.5 42.69,25.5 43.2,24.99 43.2,15.4
  Bottom Layer w0.4: P1.2 40.2,3.06 D4.1 40.2,6 v1(41,6.8)
NetD5_1: D5.1 P1.3 U2.4 U3.4 U4.4 U5.4 | length 31.4
  Top Layer w0.2: 35.9,9.5 U5.4 ; 35.9,14.5 U4.4 ; 35.9,19.5 U3.4 ; 35.9,24.5 U2.4
  Top Layer w0.4: 34.9,14.5 35.9,14.5 ; 35.9,9.5 34.9,9.5 34.8,9.6 ; 35.9,19.5 34.9,19.5 34.8,19.6 ; 35.9,24.5 35.31,24.5 34.8,23.99 34.8,19.6 ; v1(37,6.8) 35.8,8 35.4,8 34.8,8.6 34.8,9.6 ; 34.8,9.6 34.8,19.6
  Bottom Layer w0.4: v1(37,6.8) 37.8,6 37.8,3.08 P1.3
NetD6_1: D6.1 P1.4 U2.2 U3.2 U4.2 U5.2 | length 35.6
  Top Layer w0.2: v1(35.6,10.2) 35.649,10.2 35.949,10.5 U5.2 ; v1(35.6,15.2) 35.649,15.2 35.949,15.5 U4.2 ; v1(35.6,20.2) 35.649,20.2 35.949,20.5 U3.2 ; 35.9,25.5 U2.2
  Top Layer w0.4: 35.9,25.5 34.9,25.5 34,24.6 v1(34,20.2) v1(34,15.2) v1(34,10.2) 34,8.551 35.751,6.8 v1(36,6.8)
  Bottom Layer w0.4: v1(34,10.2) v1(35.6,10.2) ; v1(34,15.2) v1(35.6,15.2) ; v1(34,20.2) v1(35.6,20.2) ; P1.4 35.2,3.02 D6.1 35.2,6 v1(36,6.8)
NetD7_2: D7.2 R14.2 | length 1.5
  Top Layer w0.2: D7.2 R14.2
NetD8_2: D8.2 R15.2 | length 1.5
  Top Layer w0.2: D8.2 R15.2
NetD9_2: D9.2 L2.3 | length 3.2
  Top Layer w0.4: D9.2 23.639,36.914 L2.3
NetJ1_D+: J1.D+ R13.1 | length 3.2
  Top Layer w0.2: J1.D+ 6.4,18 R13.1
NetJ1_D-: J1.D- R12.1 | length 2.9
  Top Layer w0.2: J1.D- 7.35,18.65 R12.1
NetL2_2: L2.2 Q1.3 | length 2.1
  Top Layer w0.4: v2(26.4,38) 26.483,37.917 L2.2
  Bottom Layer w0.4: Q1.3 v2(26.4,38)
NetP4_2: P4.2 R10.1 U6.7 | length 16
  Top Layer w0.2: U6.7 42.1,32.5 42.2,32.4
  Top Layer w0.4: 42.2,32.4 42.6,32 v1(43,32) ; v1(46.4,32) 46.8,32 47.55,31.25 R10.1 47.8,30.6 46.6,29.4 46.6,25.06 P4.2
  Bottom Layer w0.4: v1(43,32) v1(46.4,32)
NetR1_2: R1.2 U1.33 | length 4.4
  Top Layer w0.2: U1.33 28.7,21.3 v1(29,21.6)
  Bottom Layer w0.2: R1.2 v1(29,21.6)
NetR9_2: R9.2 U6.2 | length 3.1
  Top Layer w0.2: 43.75,31.35 43.9,31.5 U6.2
  Top Layer w0.4: R9.2 43.75,31.35
NetR10_2: R10.2 U6.4 | length 2.9
  Top Layer w0.2: U6.4 45.9,32.5 46.15,32.75 46.25,32.75
  Top Layer w0.4: 46.25,32.75 R10.2
RST: C16.1 P2.5 R6.1 S1.0 U1.13 | length 32
  Top Layer w0.2: S1.0@9.1,6 14.9,6 16.5,6 17.2,6.7 17.2,9.2 ; P2.5 14.231,15.48 12.951,14.2 11.4,14.2 10.6,13.4 10.6,12.4 11.4,11.6 12.4,11.6 13.2,10.8 13.2,9.4 13.4,9.2 17.2,9.2 ; U1.13 19.8,10.6 19.6,10.8 18.8,10.8 17.2,9.2
  Bottom Layer w0.2: C16.1 12.95,6.3 R6.1
  other v1: 12,6.2
RXLED: R15.1 U1.8 | length 17.6
  Top Layer w0.2: R15.1 5.75,11.399 11.151,16.8 14.8,16.8 15.6,16 15.6,14.326 16.526,13.4 U1.8
SCK: P2.3 U1.9 | length 3
  Top Layer w0.2: P2.3 14.74,12.6 U1.9
TXLED: R14.1 U1.22 | length 29.5
  Top Layer w0.2: R14.1 5.75,6.05 7.2,4.6 16.6,4.6 18,6 v1(18,9) ; U1.22 27.7,9.3 v1(28,9)
  Bottom Layer w0.2: v1(18,9) v1(28,9)
USB_D+: R13.2 U1.4 | length 8.5
  Top Layer w0.2: R13.2 9.6,17.2 14.966,17.2 15.566,16.6 U1.4
USB_D-: R12.2 U1.3 | length 8.5
  Top Layer w0.2: R12.2 9.6,18 14.731,18 15.331,17.4 U1.3
VBUS: C3.2 C10.2 C18.2 D1.1 J1.Vbus U1.2 U1.7 VR1.1 | length 48
  Top Layer w0.2: D1.1 1.3,25.7 2.2,24.8 5.6,24.8 6.5,23.9 v2(6.5,19.6) ; v2@6.4,19.5 v2@6.4,19.6
  Top Layer w0.4: J1.Vbus v2@6.2,19.3 ; v2@6.4,19.5 6.3,19.4 v2@6.7,19.4 ; VR1.1 14.125,22.5 C3.2 14.9,21 7.9,21 v2(6.5,19.6) v2@6.7,19.4 ; U1.7 18.99,14.2 19.6,14.81 19.6,17.4 v1(18.8,18.2) U1.2 15.4,18.2 14.2,19.4 v2@6.7,19.4
  Bottom Layer w0.4: C18.2 5.375,19.6 v2(6.5,19.6) ; C10.2 17.9,18.2 v1(18.8,18.2)
pads on no net: J1.Case J1.ID

## Polygon pours and split planes (outlines as drawn)
GND on Bottom Layer "BottomGND" (solid, remove dead copper, pour order 4): 0.4,44.6 49.6,44.6 49.6,0.4 0.4,0.4
GND on Top Layer "Clock-Top-GND" (solid, remove dead copper, pour order 6): 18.402,0.4 26.398,0.4 26.398,8.598 18.402,8.598
GND on Top Layer "Top-GND" (solid, remove dead copper, pour order 5): 0.4,0.4 17.998,0.4 17.998,8.8 18.2,9.002 26.6,9.002 26.802,8.8 26.802,0.4 49.6,0.4 49.6,44.6 0.4,44.6

## Silkscreen, mask and mechanical layers (free items; w line width, h text height)
Top Overlay:
  lines w0.2: 12.2,42.4 12.2,44.2 20.8,44.2 20.8,42.4 ; 29.2,42.4 29.2,44.2 37.8,44.2 37.8,42.4 ; 36.8,44 37,43.8
  text "GND" at 7.8,42.6 h1
  text "U" at 13.6,42.6 h1
  text "OUT" at 15.2,42.6 h1
  text "I" at 18.8,42.6 h1
  text "FLYBACK" at 21.8,42.6 h1
  text "I" at 30.8,42.6 h1
  text "IN" at 32.6,42.6 h1
  text "U" at 35.6,42.6 h1
  text "GND" at 39.6,42.6 h1
  text "GND" at 23.6,38.6 h1
  text "USB" at 46.8,28 h1
  text "EXT" at 46.8,18.2 h1
  text "POWER SELECT" at 46.2,17.8 h1 r90
  text "ISP" at 10,9.2 h1 r90
  text "EXT POWER" at 44.6,5.8 h1 r90
  text "3V3 MAX" at 46.2,5.8 h1 r90
  text "EAP" at 37.6,4.8 h1
  text "RESET" at 18.2,1.6 h1 r90
Bottom Overlay:
  text "Mark Laane" at 18,30.2 h1
  text "University of Tartu" at 22,28.6 h1
  text "2014/2015" at 17.4,26.8 h1
Mechanical 1:
  lines w0.2: 0,0 0,45 6,45 9,45 41,45 44,45 50,45 50,0 0,0

## Text inside footprints (layer, text, board x,y; h text height)
P2: Top Overlay "6" at 12.4,17.4 h1 r90; Top Overlay "5" at 14.8,17.4 h1 r90; Top Overlay "2" at 12.4,7.8 h1 r90; Top Overlay "1" at 14.8,8.2 h1 r90